# Altium PCB PCB3.PcbDoc
Units mm, origin at the board's own origin, x right, y up, seen from the top; angles counter-clockwise.
Board outline 72.74 x 84.08 mm, 2 copper layers (Top Layer, Bottom Layer); 46 components, 39 nets, 171 pads, 0 vias.
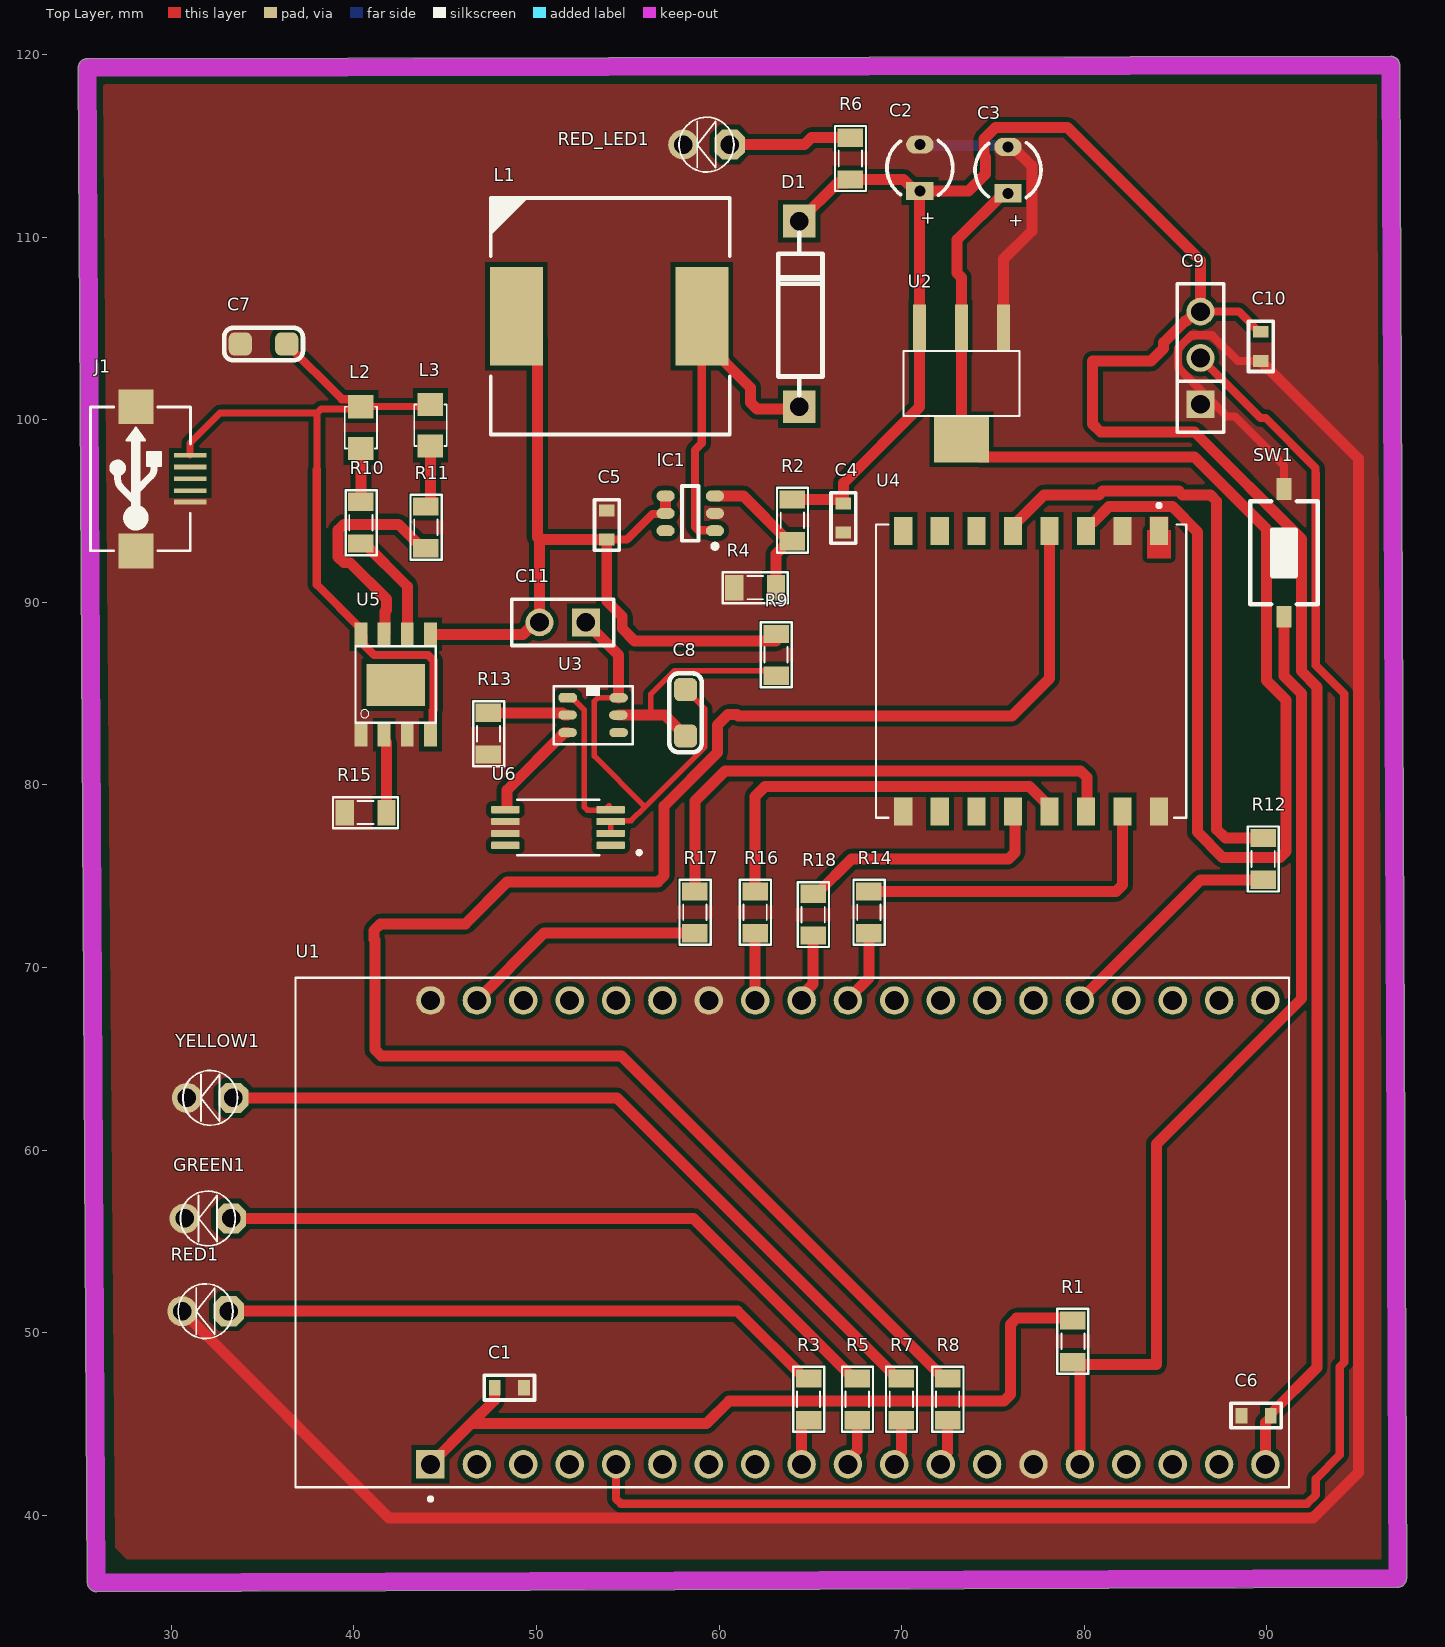
[diagram p0: Top Layer view]
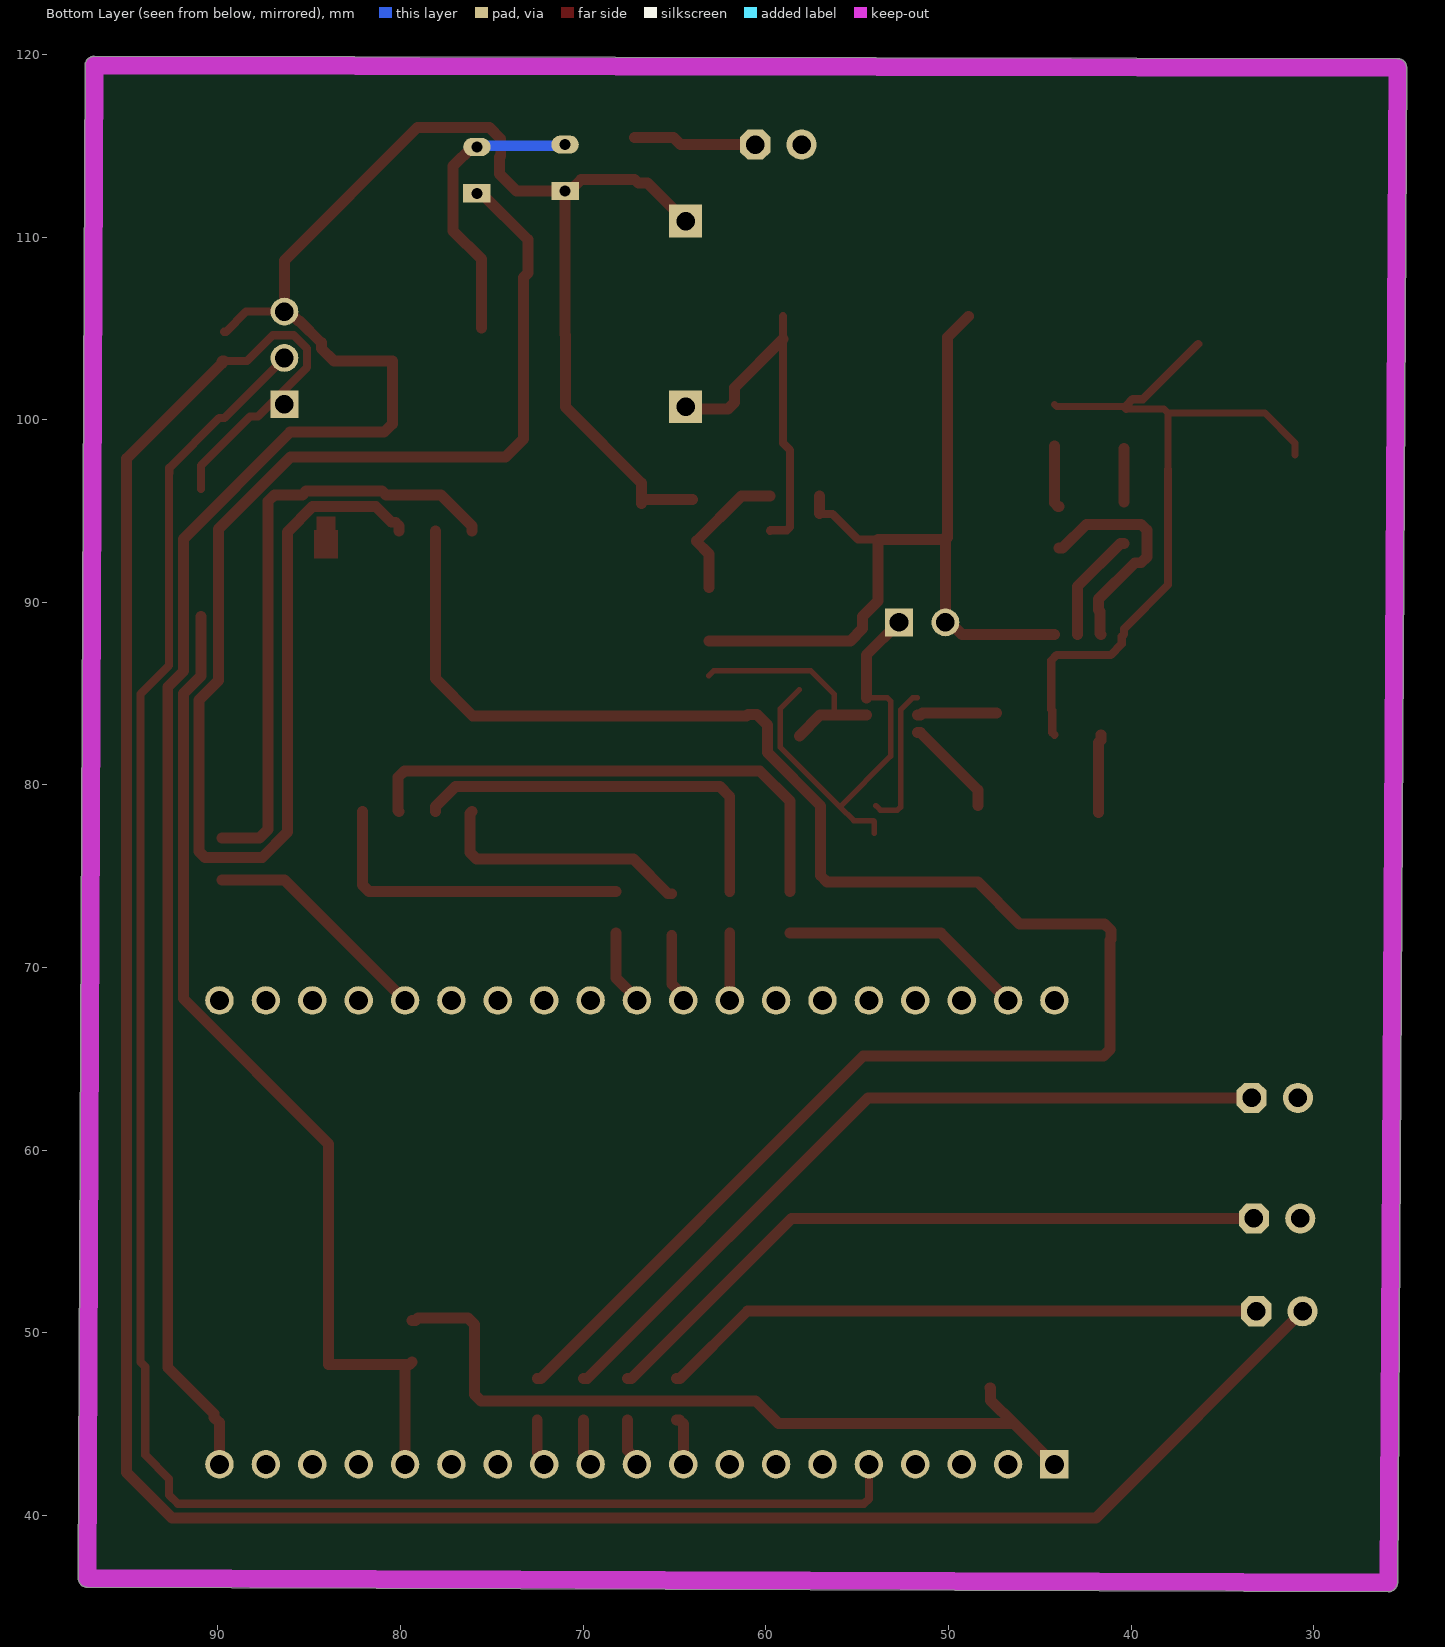
[diagram p1: Bottom Layer view, seen from below]
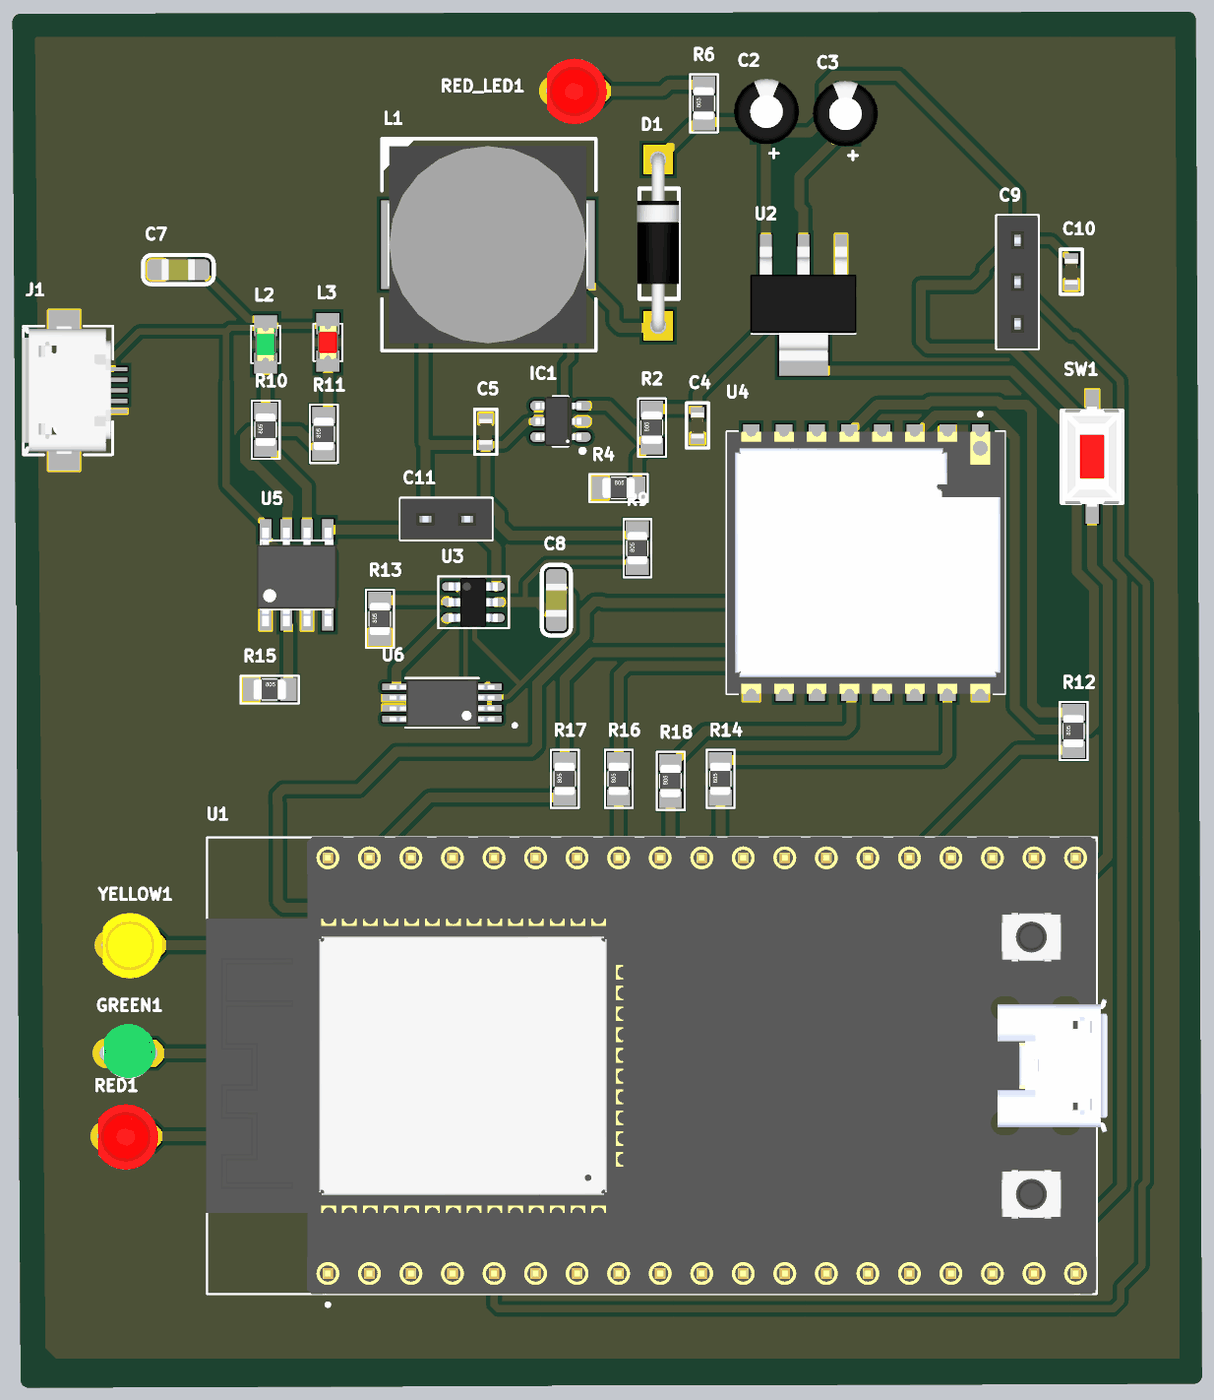
[diagram p2: 3D render of the assembled board from above, using the file's embedded part models]

## Layer stack, top to bottom
Top Solder: solder mask 0.0102, Solder Resist, Dk 3.5
Top Layer: signal copper 0.0356
Dielectric 1: dielectric 0.32, FR-4, Dk 4.8
Bottom Layer: signal copper 0.0356
Bottom Solder: solder mask 0.0102, Solder Resist, Dk 3.5

## Board outline
25.408,36.32 24.911,119.271 cw(c25.411,119.275) 25.41,119.776 96.772,119.897 cw(c96.773,119.397) 97.273,119.399 97.647,36.566 97.647,36.564 cw(c97.147,36.564) 97.148,36.064 25.91,35.822 cw(c25.908,36.322)

## Design rules (kind name [scope] priority, off if disabled: settings)
Clearance [All] p1: gap=0.254 ignorepadtopadclearanceinfootprint=FALSE except(0: Arc-Hole Track-Hole SMDPad-Hole THPad-Hole Via-Hole Fill-Hole Poly-Hole Region-Hole Text-Hole)
PlaneConnect [All] p1: planeconnectstyle=Direct reliefexpansion=0.508 reliefentries=4 reliefconductorwidth=0.254 reliefairgap=0.254
PolygonConnect [All] p1: connectstyle=Direct reliefconductorwidth=0.254 reliefentries=4 polygonreliefangle="90 Angle" airgapwidth=0.254
RoutingVias [All] p1: holewidth=0.711 width=1.27 viastyle="Through Hole" minholewidth=0.711 minwidth=1.27 maxholewidth=0.711 maxwidth=1.27
SolderMaskExpansion [All] p1: expansion=0.102 istentingtop=FALSE
Width [All] p1: maxlimit=0.6 minlimit=0.3 preferedwidth=0.45
29 further rules are at their usual default settings.

## Components (designator, comment, footprint, x,y, rotation, side; value= is the part's Value field where it differs from the comment)
C1 "104" CAP0603 48.514,46.99 r0 top
C2 "10 uF" C3MM 70.993,113.792 r90 top
C3 "10 uF" C3MM 75.819,113.665 r90 top
C4 "22uF" CAP0603 66.802,94.615 r270 top
C5 "22uF" CAP0603 53.848,94.234 r90 top
C6 "104" CAP0603 89.408,45.466 r180 top
C7 "10uF" CAP_0805 35.052,104.14 r0 top value=33p
C8 "0.1 uF" CAP_0805 58.166,83.947 r270 top value=33p
C9 "JP3" JP3-C1T 86.36,100.838 r90 top
C10 "104" CAP0603 89.662,104.013 r270 top
C11 "JP2" JP2-C1T 52.705,88.9 r180 top
D1 "SS54" DIODE/POW/1A 64.389,100.711 r90 top
GREEN1 "LED" LED-3MM-GREEN 33.274,56.261 r180 top value="LED 3 ly Single Colour"
IC1 "MT3608" "TSOP 2" 58.42,94.869 r180 top
J1 "USB-5" USB-M1 31.035,96.761 r90 top
L1 "22uH" IND_400_500_212x114_SMD 53.975,105.664 r0 top
L2 "LED 0805" LED-0805-Green 40.386,100.711 r270 top
L3 "LED 0805" LED-0805-Red 44.196,100.838 r270 top
R1 "1K" RES-SMD-0805 79.375,49.53 r270 top
R2 "110K" RES-SMD-0805 64.008,94.488 r90 top
R3 "1K" RES-SMD-0805 64.897,46.355 r90 top
R4 "15k" RES-SMD-0805 61.976,90.805 r0 top
R5 "1K" RES-SMD-0805 67.564,46.355 r90 top
R6 "330" RES-SMD-0805 67.183,114.3 r90 top
R7 "1K" RES-SMD-0805 69.977,46.355 r90 top
R8 "100" RES-SMD-0805 72.517,46.355 r90 top
R9 "100" RES-SMD-0805 63.119,87.122 r90 top
R10 "1k" RES-SMD-0805 40.386,94.361 r90 top
R11 "1k" RES-SMD-0805 43.942,94.107 r90 top
R12 "100" RES-SMD-0805 89.789,75.946 r90 top
R13 "1k" RES-SMD-0805 47.371,82.804 r90 top
R14 "100" RES-SMD-0805 68.199,73.025 r90 top
R15 "1.2k" RES-SMD-0805 40.64,78.486 r0 top
R16 "100" RES-SMD-0805 61.976,73.025 r90 top
R17 "100" RES-SMD-0805 58.674,73.025 r90 top
R18 "100" RES-SMD-0805 65.151,72.898 r90 top
RED1 "LED" LED-3MM-RED 33.147,51.181 r180 top value="LED 3 ly Single Colour"
RED_LED1 "LED" LED-3MM-RED 60.579,115.062 r180 top value="LED 3 ly Single Colour"
SW1 "SW" SW1-SMD 90.932,92.71 r90 top value="SW chip 2 pin"
U1 "ESP32-DEVKITC-32D" MODULE_ESP32-DEVKITC-32D 63.956,55.499 r90 top
U2 "LM1117-3V3" LM1117-SOP 73.279,103.759 r180 top
U3 "DW01A" SOT23-6 53.213,83.947 r0 top
U4 "RA-01H" XCVR_RA-01H 77.089,86.233 r270 top
U5 "TP4056" TP4056 42.291,85.496 r90 top
U6 "FS8205A" FS8205A 51.181,77.724 r180 top
YELLOW1 "LED" LED-3MM-YELLOW 33.401,62.865 r180 top value="LED 3 ly Single Colour"

## Footprints (in the part's own frame and the unit in brackets; to place one, negate y for a bottom-side part, rotate by r counter-clockwise, add the part's x,y. Pads: shape width x height; smd on the part's side, far side on the other; paste and mask are expansions set on the pad)
C3MM [mm]
  rect 1x1.5 hole 0.6: 1(-1.27,0)
  oval 1x1.5 hole 0.6: 2(1.27,0)
  silkscreen extent -1.5,-1.81 1.5,1.8, body extent -2,-2.03 1.99,1.97, height 7.01
CAP0603 [mm]
  rect 0.65x0.85 smd: 1(-0.8,0) 2(0.8,0)
  silkscreen extent -1.38,-0.67 1.38,0.67, body extent -0.8,-0.4 0.8,0.4, height 0.79
CAP_0805 [mm]
  rrect50% 1.27x1.27 smd: 1(-1.27,0) 2(1.27,0)
  silkscreen extent -2.16,-0.89 2.16,0.89, body extent -1.01,-0.64 1.01,0.64, height 0.61
DIODE/POW/1A [mm]
  rect 1.8x1.8 hole 1: 1(0,0) 2(10.16,0)
  silkscreen extent 0.64,-1.27 9.53,1.14, body extent -0.38,-1.28 10.54,1.28, height 2.55
FS8205A [mm]
  rrect25% 1.56x0.4 smd: 1(-2.88,1.031) 2(-2.88,0.381) 3(-2.88,-0.269) 4(-2.88,-0.919) 5(2.88,-0.919) 6(2.88,-0.269) 7(2.88,0.381) 8(2.88,1.031)
  silkscreen extent -4.54,-1.46 2.25,1.57, body extent -3.2,-1.4 3.2,1.53, height 1.2
IND_400_500_212x114_SMD [mm] "wurth inductor"
  rect 2.9x5.4 smd: 1(-5.08,0) 2(5.08,0)
  silkscreen extent -6.48,-6.48 6.6,6.48, body extent -6.12,-6.02 6.13,6.03, height 8.1
JP2-C1T [mm] "2 row, straight, gold plating"
  rect 1.52x1.52 hole 1.02: 1(0,0)
  round 1.52 hole 1.02: 2(2.54,0)
  silkscreen extent -1.52,-1.27 4.06,1.27, body extent -1.52,-1.25 4.06,1.25, height 8.51
JP3-C1T [mm] "3 row, straight, gold plating"
  rect 1.52x1.52 hole 1.02: 1(0,0)
  round 1.52 hole 1.02: 2(2.54,0) 3(5.08,0)
  silkscreen extent -1.52,-1.27 6.6,1.27, body extent -1.52,-1.25 6.6,1.25, height 8.51
LED-3MM-GREEN [mil]
  oct 65x65 hole 40: 1(0,0)
  round 65 hole 40: 2(100,0)
  silkscreen extent -9,-59 109,59, body extent -15,-70 112,60, height 182
LED-3MM-RED [mil]
  oct 65x65 hole 40: 1(0,0)
  round 65 hole 40: 2(100,0)
  silkscreen extent -9,-59 109,59, body extent -27,-77 117,80, height 181
LED-3MM-YELLOW [mil]
  oct 65x65 hole 40: 1(0,0)
  round 65 hole 40: 2(100,0)
  silkscreen extent -9,-59 109,59, body extent -27,-77 117,80, height 181
LED-0805-Green [mil]
  rect 50x55 smd: 1(0,0) 2(90,0)
  silkscreen extent 0,-35 90,35, body extent 5,-25 85,25, height 43
LED-0805-Red [mil]
  rect 50x55 smd: 1(0,0) 2(90,0)
  silkscreen extent 0,-35 90,35, body extent 5,-25 85,25, height 43
LM1117-SOP [mm]
  rect 0.7x2.54 smd: 1(-2.3,-1.27) 2(0,-1.27) 3(2.3,-1.27)
  rect 3x2.54 smd: 2(0,4.826)
  silkscreen extent -3.18,0 3.17,3.56, body extent -3.25,-1.78 3.25,5.18, height 1.68
MODULE_ESP32-DEVKITC-32D [mm]
  rect 1.56x1.56 / inner round 1.56 / far side rect 1.56x1.56 hole 1.04: J2-1(-12.7,19.76)
  round 1.56 hole 1.04: J2-2(-12.7,17.22) J2-3(-12.7,14.68) J2-4(-12.7,12.14) J2-5(-12.7,9.6) J2-6(-12.7,7.06) J2-7(-12.7,4.52) J2-8(-12.7,1.98) J2-9(-12.7,-0.56) J2-10(-12.7,-3.1) J2-11(-12.7,-5.64) J2-12(-12.7,-8.18) J2-13(-12.7,-10.72) J2-14(-12.7,-13.26) J2-15(-12.7,-15.8) J2-16(-12.7,-18.34) J2-17(-12.7,-20.88) J2-18(-12.7,-23.42) J2-19(-12.7,-25.96) J3-1(12.7,19.76) J3-2(12.7,17.22) J3-3(12.7,14.68) J3-4(12.7,12.14) J3-5(12.7,9.6) J3-6(12.7,7.06) J3-7(12.7,4.52) J3-8(12.7,1.98) J3-9(12.7,-0.56) J3-10(12.7,-3.1) J3-11(12.7,-5.64) J3-12(12.7,-8.18) J3-13(12.7,-10.72) J3-14(12.7,-13.26) J3-15(12.7,-15.8) J3-16(12.7,-18.34) J3-17(12.7,-20.88) J3-18(12.7,-23.42) J3-19(12.7,-25.96)
  silkscreen extent -14.7,-27.25 13.95,27.15, body extent -13.97,-27.9 13.97,27.2, height 6.69
RES-SMD-0805 [mil]
  rect 39.37x55 smd: 1(-45,0) 2(45,0)
  silkscreen extent -70,-34 70,33, body extent -39,-25 39,25, height 31
SOT23-6 [mil]
  oct 40x20 smd: 1(-59.41,32.4)
  oval 40x20 smd: 2(-59.41,-4.6) 3(-59.41,-42.6) 4(50.59,-42.6) 5(50,-5) 6(50.59,32.4)
  silkscreen extent -89,-68 81,57, body extent -64,-64 54,54, height 51
SW1-SMD [mm]
  rect 1.2x0.8 smd: 1(-3.5,0) 2(3.5,0)
  silkscreen extent -2.82,-1.85 2.82,1.85, body extent -3.05,-1.85 3.05,1.85, height 2.5
TP4056 [mm]
  rect 1.3x0.7 smd: 1(-2.75,1.905) 2(-2.75,0.635) 3(-2.75,-0.635) 4(-2.75,-1.905) 5(2.75,-1.905) 6(2.75,-0.635) 7(2.75,0.635) 8(2.75,1.905)
  rect 2.3x3.2 smd: GND(-0.025,0)
  silkscreen extent -2.1,-2.2 2.1,2.2, body extent -3.13,-2.45 2.87,2.45, height 1.75
"TSOP 2" [mm] "TSOP, 6-Leads, Body 2.90x1.60mm, Pitch 0.95mm, IPC Medium Density"
  oval 1x0.6 smd: 1(-1.35,0.95) 2(-1.35,0) 3(-1.35,-0.95) 4(1.35,-0.95) 5(1.35,0) 6(1.35,0.95)
  silkscreen extent -1.48,-1.5 0.45,1.92, body extent -1.27,-1.5 1.53,1.5, height 1.45
USB-M1 [mil]
  rect 10x70 smd: 1(51.18,0) 2(25.59,0) 3(0,0) 4(-25.59,0) 5(-50,0)
  rect 74.8x74.8 smd: 5(-155.51,116.84) 5(155.51,116.84)
  silkscreen extent -155,-1 155,215, body extent -157,5 158,218, height 107
XCVR_RA-01H [mm]
  rect 1.536x1 smd paste-2 mask+0: 1(-7.682,7)
  rect 1.536x1 smd: 2(-7.682,5) 3(-7.682,3) 4(-7.682,1) 5(-7.682,-1) 6(-7.682,-3) 7(-7.682,-5) 8(-7.682,-7) 9(7.682,-7) 10(7.682,-5) 11(7.682,-3) 12(7.682,-1) 13(7.682,1) 14(7.682,3) 15(7.682,5) 16(7.682,7)
  Top Layer region: -6.188,6.365 -7.724,6.365 -7.724,6.5 -8.45,6.5 -8.45,7.5 -7.724,7.5 -7.724,7.635 -6.188,7.635
  silkscreen extent -9.17,-8.5 8.03,8.5, body extent -8,-8.5 8,8.5, height 3.4

## Part data
C1 C4 C5 C6 C10: library part CC0603JRNPO9BN300, "CAP CER 30PF 50V NPO 0603", Manufacturer=Yageo, Operating Temperature="-55°C ~ 125°C", Package / Case="0603 (1608 Metric)", Ratings=-, Supplier Part Number 1=311-3357-1-ND, Temperature Coefficient="C0G, NP0", Tolerance=±5%, Voltage - Rated=50V, Applications="General Purpose", Category=Capacitors, ComponentLink1Description=http://www.yageo.com/documents/recent/UPY-GP_NP0_16V-to-50V_16.pdf, ComponentLink1URL=http://www.yageo.com/documents/recent/UPY-GP_NP0_16V-to-50V_16.pdf, Failure Rate=-, Features=-, Height - Seated (Max)=-, Lead Spacing=-, Lead Style=-, Manufacturer Part Number=CC0603JRNPO9BN300, Mounting Type="Surface Mount, MLCC", Notification="Current market demand for these product types have resulted in fluctuating and extending lead times. Lead times may differ.", Packaging="Cut Tape (CT)", Part Status=Active, Pricing 1="1=0.1, 10=0.041, 100=0.0182, 500=0.01302, 1000=0.01022 (USD)", RoHS="RoHS Compliant", Size / Dimension="0.063\" L x 0.032\" W (1.60mm x 0.80mm)", Stock 1=0, Supplier 1=Digi-Key, Thickness (Max)="0.035\" (0.90mm)"
C2 C3: library part "Cap Pol", "Polarized Capacitor (Axial)", LatestRevisionDate=17-Jul-2002, LatestRevisionNote="Re-released for DXP Platform.", PackageReference=POLAR0.8, Published=8-Jun-2000, Publisher="Altium Limited"
C7 C8: library part CapSMD, "Capacitor", LatestRevisionDate=17-Jul-2002, LatestRevisionNote="Re-released for DXP Platform.", PackageReference=RAD-0.3, Published=8-Jun-2000, Publisher="Altium Limited"
C9: "WR-PHD 2.54 mm Angled Socket Header", Manufacturer="W¨¹rth Elektronik eiSos GmbH", partNo=613003143121, ComponentLink1 Description=Manufacturer, ComponentLink1URL=http://www.we-online.com, ComponentLink2 Description=Datasheet, ComponentLink2URL=http://katalog.we-online.de/em/datasheet/6130xx143121.pdf, Created by="Karrer Zheng", Created Date="29 March 2013", NoPins=03
C11: "WR-PHD 2.54 mm Angled Socket Header", Manufacturer="W¨¹rth Elektronik eiSos GmbH", partNo=613002143121, ComponentLink1 Description=Manufacturer, ComponentLink1URL=http://www.we-online.com, ComponentLink2 Description=Datasheet, ComponentLink2URL=http://katalog.we-online.de/em/datasheet/6130xx143121.pdf, Created by="Karrer Zheng", Created Date="29 March 2013", NoPins=02
D1: library part "Diode Power", "Diode Power", PackageDocument=Aug-1999, ComponentLink1Description="Manufacturer Link", ComponentLink1URL=http://www.fairchildsemi.com/, ComponentLink2Description=Datasheet, ComponentLink2URL=http://www.fairchildsemi.com/ds/1N%2F1N5400.pdf, DatasheetDocument=1998, LatestRevisionDate=17-Jul-2002, LatestRevisionNote="Re-released for DXP Platform.", PackageReference=DO-201AD, Published=8-Jun-2000, Publisher="Altium Limited"
GREEN1 RED1 RED_LED1 YELLOW1: "LED Single colour Green and Red"
J1: Manufacturer=FCI, Manufacturer Part Number=10118193-0001LF, Supplier Part Number 1=609-4616-1-ND, .Checked PCB=RF, .Checked SCH=MM, .Creator=MM, Category="Connectors, Interconnects", ComponentLink1Description=http://portal.fciconnect.com/Comergent//fci/drawing/10118193.pdf, ComponentLink1URL=http://portal.fciconnect.com/Comergent//fci/drawing/10118193.pdf, Connector Type="USB - micro B", Features="Shielded, Solder Retention", Gender=Receptacle, Ingress Protection=-, Mounting Type="Surface Mount, Right Angle, Horizontal", Number of Contacts=5, Packaging="Cut Tape (CT)", Pricing 1="1=0.46, 10=0.433, 25=0.3712, 50=0.3156, 100=0.3032, 250=0.27224, 500=0.25988 (USD)", RoHS="RoHS Compliant", Specifications="USB 2.0", Stock 1=28642, Supplier 1=Digi-Key
L1: library part IND_1mH-0.6A-20%-SMD, "1mH Shielded Wirewound Inductor 600mA 1.82Ohm Max Nonstandard", Alternate Part Number-1=NA, Case/Package=SMD, Manufacturer=Coilcraft, Manufacturer Part Number=74477030, Supplier Part Number-1=74477030, Supplier-1=WURTH
L2: library part "LED 0805 Xanh La", "Dán", Chung_Loai=Dán, Don_Vi=Con, Ma_Hang=MH002326, Ten_Linh_Kien="LED 0805 Màu Xanh Lá (Green)"
L3: library part "LED 0805 Do", "Dán", Chung_Loai=Dán, Don_Vi=Con, Ma_Hang=MH000897, Ten_Linh_Kien="LED 0805 Màu Đỏ (Red)"
R1 R2 R3 R4 R5 R6 R7 R8 R9 R10 R11 R12 R13 R14 R15 R16 R17 R18: library part "Resistor - SMD", "Resistor", Manufacturer="Generic Components", Class=Passive, Published=08/06/2000, Publisher="Altium Hobart Technology Centre"
SW1: library part SW2, "Switch button 2 pin"
U1: "WiFi Development Tools (802.11) ESP32 General Development Kit, ESP32-WROOM-32D on the board", Package=None, Check_prices=https://www.snapeda.com/parts/ESP32-DEVKITC-32D/Espressif+Systems/view-part/?ref=eda, MF="Espressif Systems", MP=ESP32-DEVKITC-32D, SnapEDA_Link=https://www.snapeda.com/parts/ESP32-DEVKITC-32D/Espressif+Systems/view-part/?ref=snap
U2: library part LM1117-ADJ, "800mA Low-Dropout Linear Regulator", Creator="Nguyen Ba Bien", Website=http://group3i.net
U3: "One Cell Lithium-ion/Polymer Battery Protection IC"
U4: "MÃ´-Ä‘un thu phÃ¡t LoRaâ„¢ ISM < 1GHz chung KhÃ´ng bao gá»“m Äƒng-ten 803 MHz ~ 930 MHz GiÃ¡ treo bá» máº·t", Package=Package, Check_prices=https://www.snapeda.com/parts/RA-01H/AI-Thinker/view-part/?ref=eda, MF=AI-Thinker, MP=RA-01H, SnapEDA_Link=https://www.snapeda.com/parts/RA-01H/AI-Thinker/view-part/?ref=snap
U5: "Complete single cell Li-Ion battery with a constant current / constant voltage linear charger"

## Nets (pads, with @x,y where several pads share a name; then routed paths per layer and width w, separated by ;. In a path a pad name is that pad's centre, name@x,y a point inside that pad or via, vN(x,y) a via of type N, cw(c..) or ccw(c..) an arc to the next point about the centre after c; other vN are vias at no path point)
3.3V: C1.1 R1.1 U1.J2-1 | length 43.3
  Top Layer w0.6: U1.J2-1 46.419,45.021 ; C1.1 47.689,46.965 47.689,46.292 46.419,45.021 ; R1.1 79.177,50.673 79.05,50.8 76.297,50.8 75.946,50.449 75.946,46.617 75.595,46.266 60.554,46.266 59.31,45.021 46.419,45.021
3V3: C3.1 U2.2 U4.3 | length 81.1
  Top Layer w0.6: C3.1 75.569,112.395 73.029,109.855 73.029,108.027 73.279,107.777 73.279,105.029 73.279,98.933 74.249,97.963 86.027,97.963 89.978,94.012 89.978,85.718 91.041,84.654 91.041,76.36 90.717,76.035 87.574,76.035 86.196,77.413 86.196,93.859 84.818,95.237 81.36,95.237 80.506,94.383 80.289,94.383 80.089,94.183 U4.3
5V: C2.1 C4.1 C6.1 C9.3 C10.1 D1.2 R2.2 R6.1 U1.J2-19 U2.3 | length 133.6
  Top Layer w0.45: C9.3 88.457,105.918 89.562,104.813 C10.1
  Top Layer w0.6: R2.2 C4.1@66.486,95.631 ; D1.2 66.475,112.957 66.983,112.957 R6.1 70.108,113.157 70.743,112.522 C2.1 ; C4.1 66.802,96.52 70.979,100.697 70.979,104.648 70.986,104.655 70.986,112.515 C2.1 ; U1.J2-19 89.916,45.074 90.208,45.366 C6.1 90.208,45.566 92.749,48.107 92.749,85.362 91.886,86.225 91.886,93.473 86.045,99.314 80.899,99.314 80.455,99.758 80.455,103.205 83.647,103.205 84.342,103.9 84.342,104.214 85.524,105.396 85.589,105.396 86.111,105.918 C9.3 86.36,108.713 79.084,115.989 75.132,115.989 74.515,115.372 74.515,114.445 74.584,114.376 74.584,113.449 73.657,112.522 C2.1
Data: C9.2 U1.J2-5 | length 106.9
  Top Layer w0.45: U1.J2-5 54.356,40.904 54.62,40.64 92.202,40.64 92.674,41.112 92.674,42.001 93.98,43.307 93.98,48.136 94.234,48.39 94.234,84.979 92.674,86.538 92.674,97.064 92.665,97.073 92.665,97.362 89.934,100.093 89.645,100.093 C9.2
DIO0: R12.2 U4.5 | length 33.2
  Top Layer w0.6: U4.5 76.089,94.183 77.791,95.885 80.8,95.885 81.006,96.091 85.172,96.091 85.378,95.885 86.898,95.885 87.249,95.534 87.249,77.567 87.727,77.089 R12.2
GND: C1.2 C2.2 C3.2 C4.2 C5.2 C6.2 C7.1 C9.1 C10.2 GREEN1.2 IC1.2 J1.5 R4.1 R13.1 R15.1 RED1.2 RED_LED1.2 SW1.2 U1.J2-14 U1.J3-1 U1.J3-7 U2.1 U4.2 U4.9 U4.16 U5.1 U5.3 U6.6 U6.7 YELLOW1.2 | length 165.1
  Top Layer w0.45: C10.2 88.406,103.213 87.002,104.617 85.847,104.617 85.121,103.891 85.121,102.865 87.811,100.175 88.242,100.175 90.932,97.485 SW1.2
  Top Layer w0.6: RED1.2 41.927,39.861 92.525,39.861 95.013,42.349 95.013,97.862 89.787,103.088 89.787,103.188 89.762,103.213 C10.2 ; U2.1 75.579,108.79 77.123,110.334 77.123,113.881 76.069,114.935 C3.2
  Bottom Layer w0.6: C2.2 71.056,114.998 75.755,114.998 C3.2
GREEN: R5.1 U1.J2-10 | length 2.6
  Top Layer w0.6: U1.J2-10 67.056,43.059 67.564,43.567 R5.1
IO2: R12.1 U1.J3-15 | length 12.8
  Top Layer w0.6: U1.J3-15 86.36,74.803 R12.1
IO5: R14.1 U1.J3-10 | length 4.2
  Top Layer w0.6: U1.J3-10 67.056,68.289 68.199,69.432 R14.1
IO13: R1.2 SW1.1 U1.J2-15 | length 54.8
  Top Layer w0.6: R1.2 79.502,48.26 R1.2@79.683,48.26 ; U1.J2-15 79.756,48.187 R1.2@79.683,48.26 ; SW1.1 90.932,85.971 91.895,85.008 91.895,68.292 83.947,60.343 83.947,48.26 R1.2@79.683,48.26
IO14: R8.1 U1.J2-12 | length 2.6
  Top Layer w0.6: U1.J2-12 72.136,43.059 72.517,43.44 R8.1
IO18: R18.1 U1.J3-9 | length 3.8
  Top Layer w0.6: U1.J3-9 64.516,68.459 65.151,69.094 R18.1
IO19: R16.1 U1.J3-8 | length 3.7
  Top Layer w0.6: U1.J3-8 R16.1
IO23: R17.1 U1.J3-2 | length 13.5
  Top Layer w0.6: U1.J3-2 50.419,71.882 R17.1
MISO: R16.2 U4.13 | length 22.3
  Top Layer w0.6: R16.2 61.976,79.375 62.519,79.918 76.99,79.918 78.089,78.819 U4.13
MOSI: R17.2 U4.14 | length 29.1
  Top Layer w0.6: R17.2 58.674,79.114 60.332,80.772 79.786,80.772 80.137,80.421 80.137,78.599 U4.14
NetC8_2: C8.2 R9.1 U3.5 | length 12.8
  Top Layer w0.3: 56.261,83.82 56.261,84.967 57.55,86.256 62.842,86.256 R9.1
  Top Layer w0.6: U3.5 56.261,83.82 57.023,83.82 C8.2
NetD1_1: D1.1 IC1.1 L1.2 | length 20.3
  Top Layer w0.45: L1.2 59.055,104.414 59.055,98.711 58.674,98.33 58.674,94.117 58.843,93.948 59.741,93.948 IC1.1
  Top Layer w0.6: L1.2@59.055,104.414 61.722,101.747 61.722,100.935 62.073,100.584 64.262,100.584 D1.1
NetGREEN1_1: GREEN1.1 R5.2 | length 37.9
  Top Layer w0.6: GREEN1.1 58.602,56.261 67.366,47.498 R5.2
NetIC1_3: IC1.3 R2.1 R4.2 | length 7.9
  Top Layer w0.6: IC1.3 61.335,95.819 63.81,93.345 63.119,92.654 R4.2
NetL2_2: L2.2 R10.2 | length 2.9
  Top Layer w0.6: R10.2 L2.2
NetL3_2: L3.2 R11.2 | length 3.4
  Top Layer w0.6: R11.2 43.996,95.25 44.196,95.45 L3.2
NetR3_2: R3.2 RED1.1 | length 33.3
  Top Layer w0.6: RED1.1 61.015,51.181 64.699,47.498 R3.2
NetR6_2: R6.2 RED_LED1.1 | length 6.8
  Top Layer w0.6: RED_LED1.1 64.676,115.062 65.057,115.443 R6.2
NetR7_2: R7.2 YELLOW1.1 | length 42.9
  Top Layer w0.6: YELLOW1.1 54.411,62.865 69.779,47.498 R7.2
NetR10_1: R10.1 U5.6 | length 6.1
  Top Layer w0.6: R10.1 40.584,93.218 42.926,90.876 U5.6
NetR11_1: R11.1 U5.7 | length 12.5
  Top Layer w0.6: U5.7 41.706,88.296 41.706,89.493 41.783,89.57 41.783,90.17 39.789,92.164 39.458,92.164 39.134,92.489 39.134,93.947 39.458,94.272 42.435,94.272 43.744,92.964 R11.1
NetR13_2: R13.2 U3.2 | length 4.4
  Top Layer w0.6: R13.2 51.425,83.947 51.542,83.83 U3.2
NetR15_2: R15.2 U5.2 | length 4.3
  Top Layer w0.6: U5.2 41.656,82.446 41.783,82.319 R15.2
NetU3_1: U3.1 U6.4 | length 8
  Top Layer w0.3: U3.1 51.958,84.77 52.616,84.112 52.616,78.789 52.792,78.613 53.721,78.613 53.975,78.867
NetU3_3: U3.3 U6.5 | length 5.5
  Top Layer w0.6: 48.387,78.867 48.387,79.71 51.542,82.865 U3.3
NSS: R14.2 U4.15 | length 18.1
  Top Layer w0.6: R14.2 81.738,74.168 82.089,74.519 U4.15
RED: R3.1 U1.J2-9 | length 2.7
  Top Layer w0.6: U1.J2-9 64.516,45.012 64.716,45.212 R3.1
RST: R8.2 U4.4 | length 99.3
  Top Layer w0.6: R8.2 72.319,47.498 54.665,65.151 41.499,65.151 41.148,65.502 41.148,71.501 41.108,71.541 41.108,72.039 41.459,72.39 46.101,72.39 48.387,74.676 56.642,74.676 56.993,75.027 56.993,78.854 59.909,81.769 59.909,83.28 60.481,83.852 60.978,83.852 61.048,83.782 76.048,83.782 78.089,85.822 U4.4
SCK: R18.2 U4.12 | length 14.3
  Top Layer w0.6: R18.2 65.349,74.041 67.255,75.946 75.849,75.946 76.2,76.297 76.2,78.44 U4.12
VBat+: C5.1 C11.2 IC1.4 IC1.5 L1.1 R9.2 U5.5 | length 46.1
  Top Layer w0.45: C5.1 54.948,93.434 56.354,94.84 57.041,94.84 IC1.5
  Top Layer w0.6: U5.5 49.262,88.246 49.916,88.9 C11.2 50.165,93.434 ; L1.1 50.045,104.514 50.045,93.554 50.165,93.434 ; 50.165,93.554 50.165,93.434 ; IC1.5 IC1.4 ; R9.2@63.119,87.884 55.372,87.884 54.697,88.559 54.697,89.212 53.848,90.06 C5.1 50.343,93.434 50.254,93.345 50.165,93.434
VBat-: C8.1 C11.1 U3.6 U6.2 U6.3 | length 24.3
  Top Layer w0.3: U6.2 U6.3 54.107,78.039 55.183,78.039 55.946,78.801 ; U3.6 53.341,84.77 53.166,84.594 53.166,84.346 53.17,84.341 53.17,81.577 55.946,78.801 ; C8.1 59.205,84.178 59.205,82.061 55.946,78.801
  Top Layer w0.6: C11.1 54.498,87.107 U3.6
VCC: C7.2 J1.1 L2.1 L3.1 U5.4 U5.8 | length 42.1
  Top Layer w0.381: J1.1 31.035,98.726 32.67,100.361 37.973,100.361 ; 37.973,97.266 37.973,100.361 ; L2.1@40.259,100.584 38.196,100.584 37.973,100.361 ; L2.1 44.069,100.711 L3.1
  Top Layer w0.45: C7.2 39.341,101.121 39.913,101.121 40.259,100.774 L2.1@40.259,100.584 ; 37.973,97.266 37.973,90.959 40.386,88.546 U5.8 40.511,88.121 40.511,87.714 41.108,87.117 44.072,87.117 44.37,86.819 44.37,84.123 44.319,84.071 44.319,82.869 U5.4
YELLOW: R7.1 U1.J2-11 | length 2.6
  Top Layer w0.6: U1.J2-11 69.596,43.059 69.977,43.44 R7.1
pads on no net: IC1.6 J1.2 J1.3 J1.4 U1.J2-2 U1.J2-3 U1.J2-4 U1.J2-6 U1.J2-7 U1.J2-8 U1.J2-13 U1.J2-16 U1.J2-17 U1.J2-18 U1.J3-3 U1.J3-4 U1.J3-5 U1.J3-6 U1.J3-11 U1.J3-12 U1.J3-13 U1.J3-14 U1.J3-16 U1.J3-17 U1.J3-18 U1.J3-19 U3.4 U4.1 U4.6 U4.7 U4.8 U4.10 U4.11 U5.GND U6.1 U6.8

## Polygon pours and split planes (outlines as drawn)
GND on Top Layer "GND_L01_P001" (solid, remove dead copper, pour order 1): 26.289,118.364 96.012,118.364 96.139,118.491 96.266,118.364 96.266,37.592 27.559,37.592 26.924,38.227

## Keep-outs
Keep-Out Layer:
  lines w1: 25.411,119.275 25.908,36.322 97.147,36.564 96.773,119.397 25.411,119.275

## Text inside footprints (layer, text, board x,y; h text height)
C2: Top Overlay "+" at 71.755,110.617 h0.7 r90
C3: Top Overlay "+" at 76.581,110.49 h0.7 r90